# EAGLE board etchasketch (EAGLE 9.2.2)
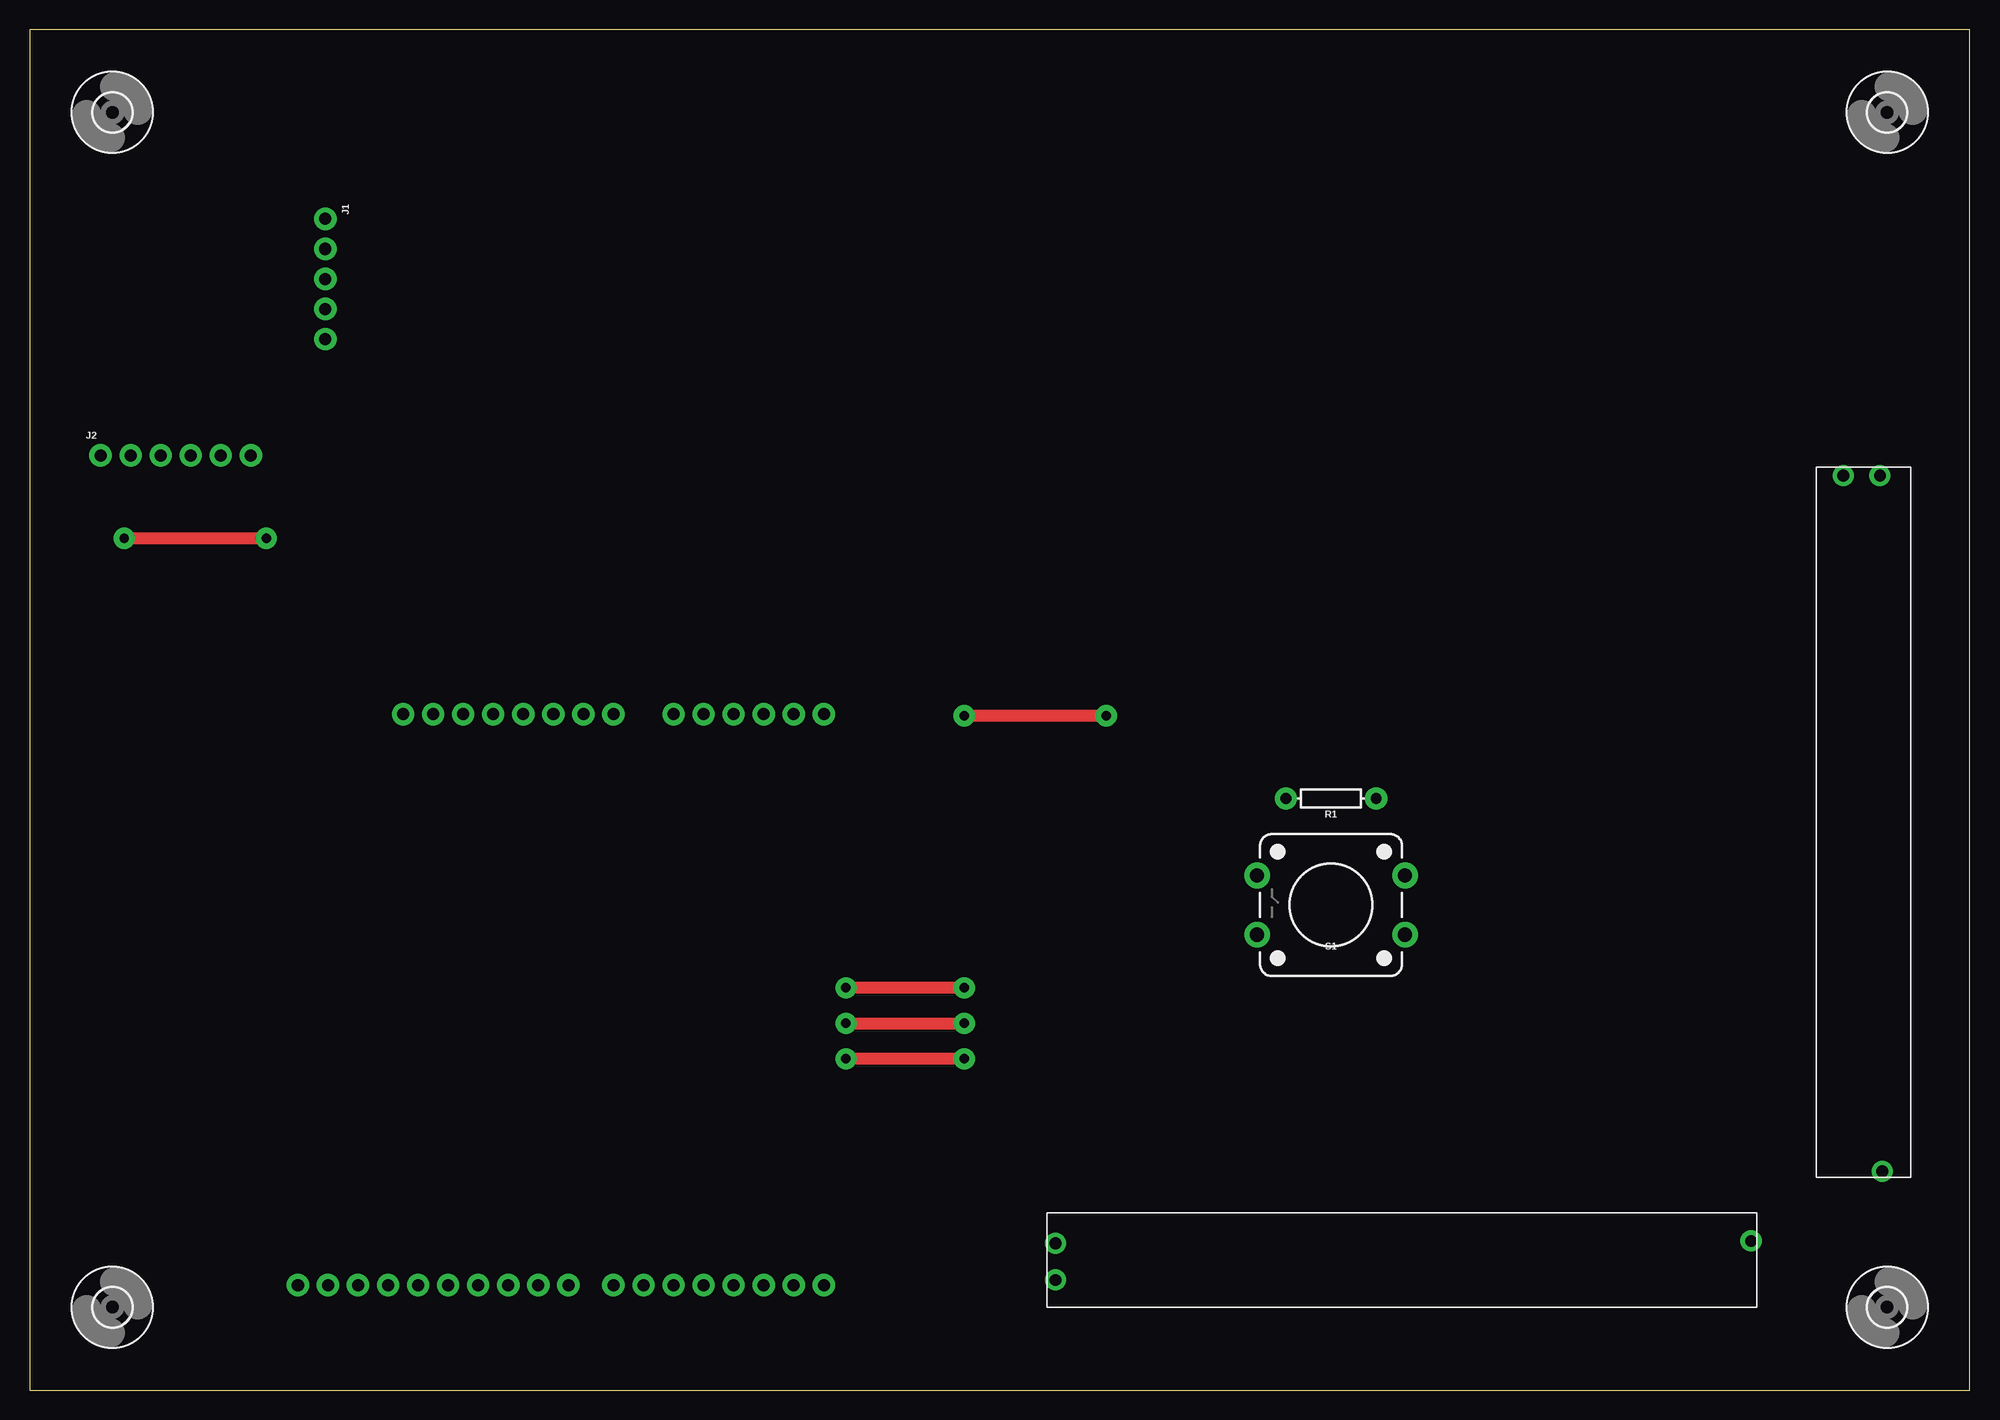
[diagram p0: board, top side]
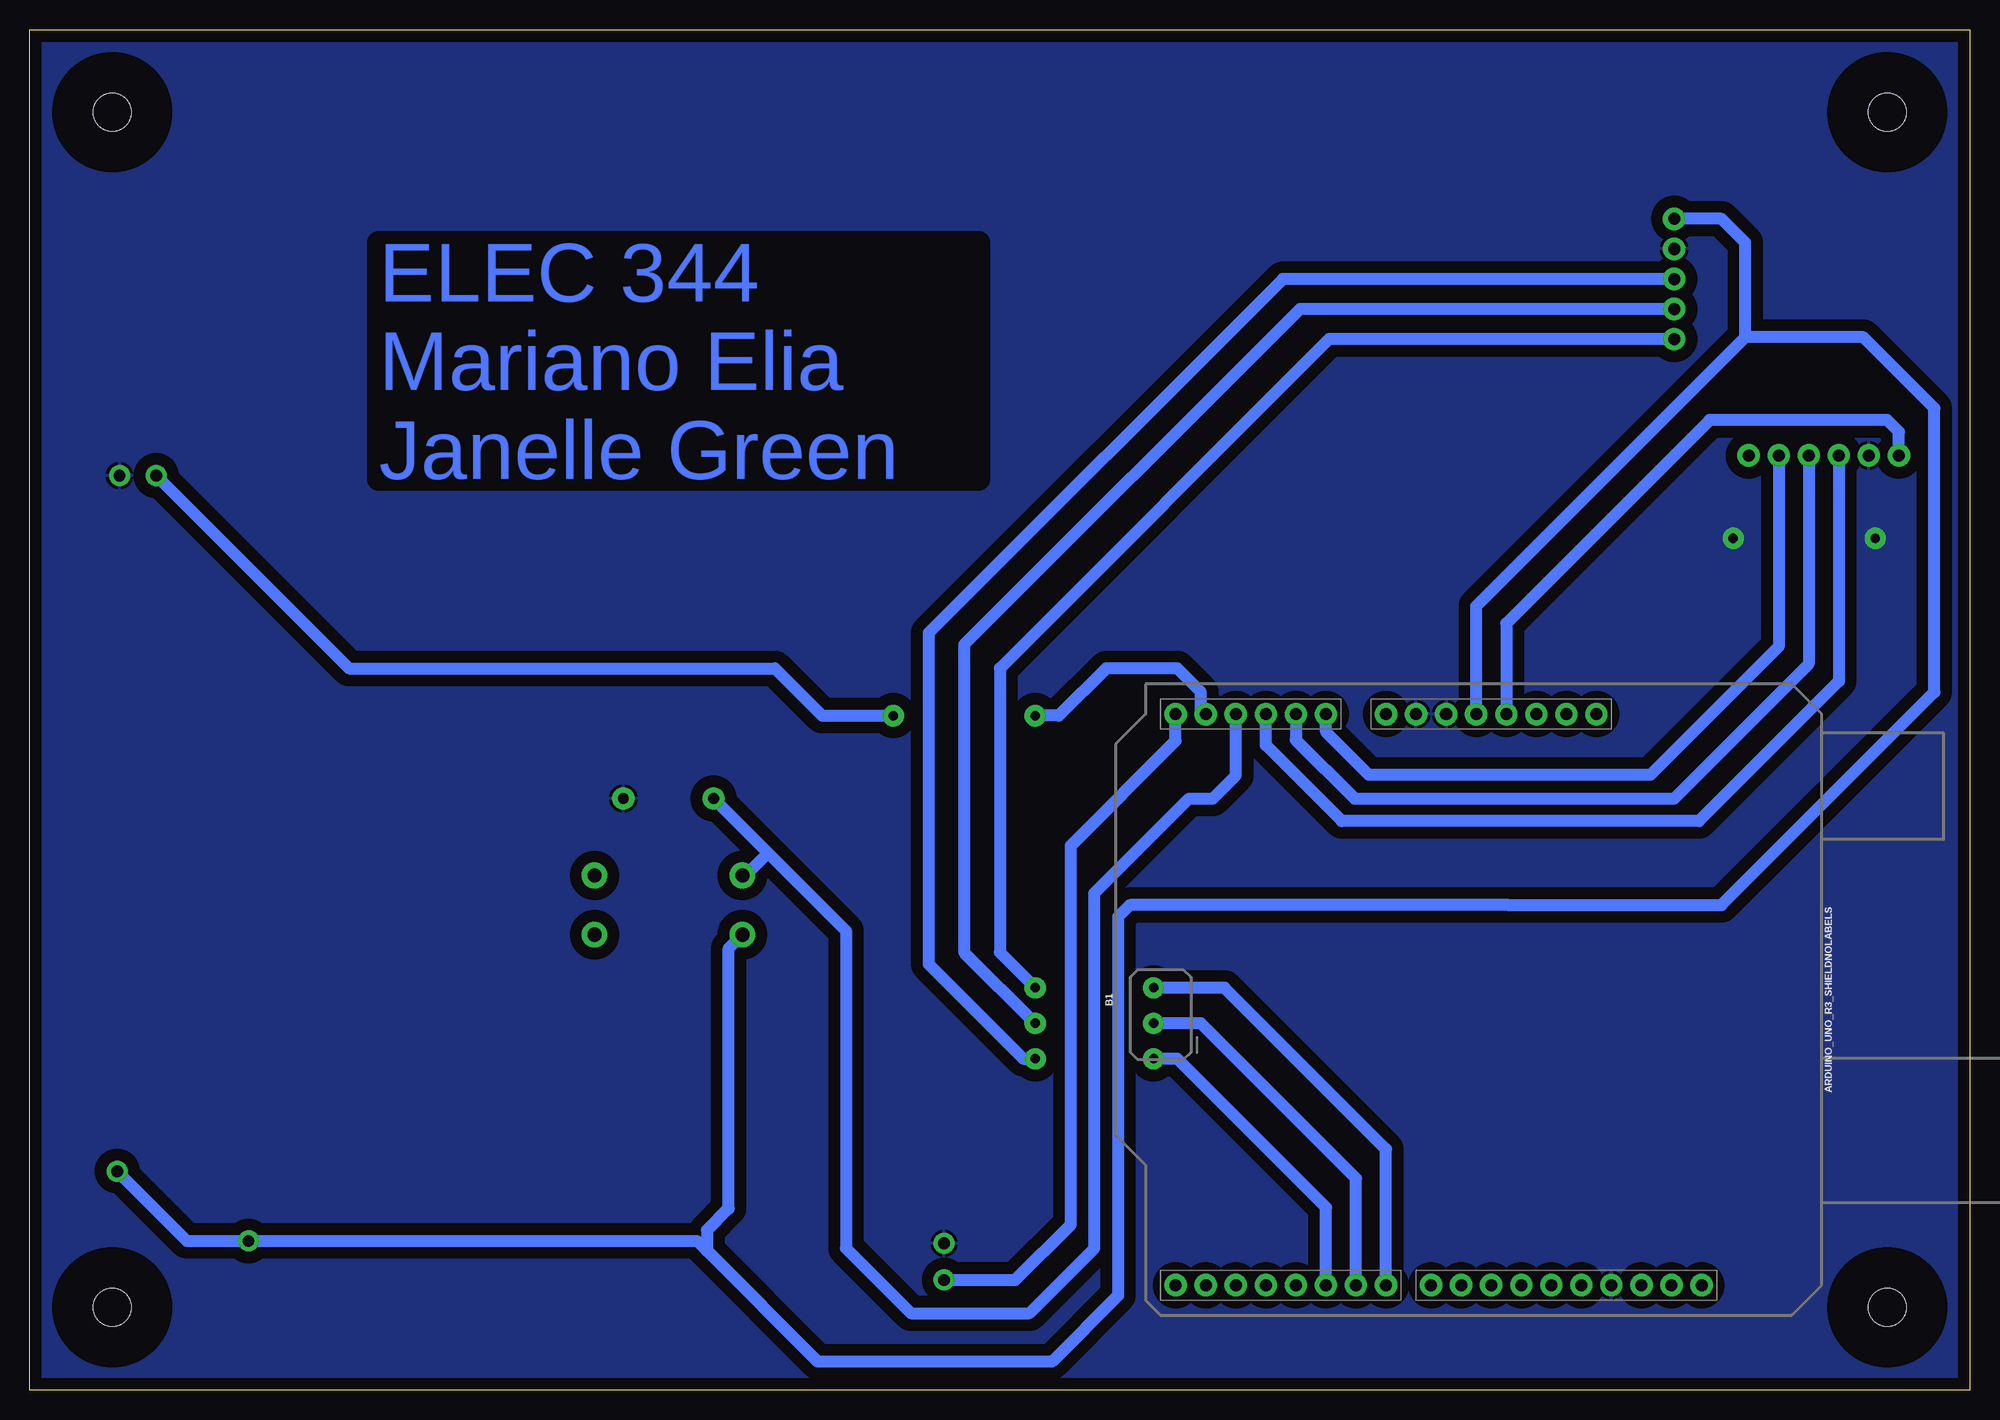
[diagram p1: board, bottom side, seen from below]

Size 164 x 115 mm. Coordinates in mm from the lower left corner, seen from the top.
Outline: 0,0 164,0 164,115 0,115 0,0
Copper layers (1*16): Top 0.035mm / dielectric 1.5mm / Bottom 0.035mm
Design rules "default *": minimum track width 12mil, minimum drill 0.35mm, track to track 10mil, track to pad 10mil, pad to pad 10mil, via to via 10mil, smd to smd 6mil, copper to edge 40mil, drill to drill 10mil, minimum pad ring 10mil, minimum via ring 8mil, stop-mask expansion 4mil, vias tented up to drill 0mil, thermal gap 10mil

## Footprints (pad centres in the part's own frame; a part is rotated, then mirrored left to right if it is on the bottom)
UNO_R3_SHIELD_NOLABELS = drill 1.016 pad 1.88: 3.3V 24.13,-3.81; 5V 24.13,-1.27; A0 24.13,11.43; A1 24.13,13.97; A2 24.13,16.51; A3 24.13,19.05; A4 24.13,21.59; A5 24.13,24.13; AREF -24.13,-15.24; D2 -24.13,19.05; D3 -24.13,16.51; D4 -24.13,13.97; D5 -24.13,11.43; D6 -24.13,8.89; D7 -24.13,6.35; D8 -24.13,2.54; D9 -24.13,0; D10 -24.13,-2.54; D11 -24.13,-5.08; D12 -24.13,-7.62; D13 -24.13,-10.16; GND@0 24.13,1.27; GND@1 24.13,3.81; GND@2 -24.13,-12.7; IOREF 24.13,-8.89; NC 24.13,-11.43; RES 24.13,-6.35; RX -24.13,24.13; SCL -24.13,-20.32; SDA -24.13,-17.78; TX -24.13,21.59; VIN 24.13,6.35
3,2 = hole 3.2: 0,0
1X05_NO_SILK = drill 1.016 pad 1.88: 1 0,0; 2 2.54,0; 3 5.08,0; 4 7.62,0; 5 10.16,0
1X06_NO_SILK = drill 1.016 pad 1.88: 1 0,0; 2 2.54,0; 3 5.08,0; 4 7.62,0; 5 10.16,0; 6 12.7,0
AXIAL-0.3 = drill 0.9 pad 1.88: P$1 -3.81,0; P$2 3.81,0
TACTILE_SWITCH_PTH_12MM = drill 1.2 pad 2.159: 1 6.25,-2.5; 2 -6.25,-2.5; 3 6.25,2.5; 4 -6.25,2.5
SLIDINGPOT = drill 1 pad 1.778: P$1 -29.3,1.4; P$2 -29.3,-1.7; P$3 29.5,1.6

## Placement (x,y rotation side)
B1  ARDUINO_UNO_R3_SHIELDNOLABELS  [UNO_R3_SHIELD_NOLABELS]  43,33 90 bottom
H1  MOUNT-HOLE3.2  [3,2]  7,7 0 top
H2  MOUNT-HOLE3.2  [3,2]  7,108 0 top
H3  MOUNT-HOLE3.2  [3,2]  157,108 0 top
H4  MOUNT-HOLE3.2  [3,2]  157,7 0 top
J1  [1X05_NO_SILK]  25,99 270 top
J2  [1X06_NO_SILK]  6,79 0 top
R1  10k  [AXIAL-0.3]  110,50 180 top
S1  MOMENTARY-SWITCH-SPST-PTH-12MM  [TACTILE_SWITCH_PTH_12MM]  110,41 180 top
U$1  6CMSLIDINGPOT  [SLIDINGPOT]  155,48 270 top
U$2  6CMSLIDINGPOT  [SLIDINGPOT]  116,11 0 top

## Library data of the parts
B1 = SparkFun-Boards
H1-H4 = holes
J1 J2 = SparkFun-Connectors
R1 = SparkFun-Resistors; PROD_ID: RES-09435
S1 = SparkFun-Switches; PROD_ID: SWCH-09185; SF_SKU: COM-09190
U$1 U$2 = TPS564208

## Nets
3.3V: B1.3.3V J2.1
5V: B1.5V J1.1 S1.3 U$1.P$3 U$2.P$3
CLK: B1.D7 J1.5
CS: B1.D6 J1.4
DIN: B1.D5 J1.3
GND: B1.GND@0 B1.GND@1 B1.GND@2 J1.2 J2.2 R1.P$1 U$1.P$1 U$2.P$1
N$1: B1.A4 U$1.P$2
N$2: B1.A3 R1.P$2 S1.1
N$6: B1.A5 U$2.P$2
ST: J2.6
XDIR: B1.A2 J2.3
YDIR: B1.A1 J2.4
ZDIR: B1.A0 J2.5

## Tracks (layer width: path | path; a pad name or v marks a point on that pad's centre or on a via)
3.3V
  Bottom 1: J2.1 6,81 7,82 22,82 39.19,64.81 B1.3.3V
5V
  Bottom 1: B1.5V 41.73,66.27 19,89 | J1.1 21,99 19,97 19,89 | U$1.P$3 150.7,12.6 U$2.P$3 107.6,12.6 106.75,11.75 | 19,89 9,89 3,83 3,59 21,41 38,41 39,41 71,41 72,40 72,8 77.6,2.4 97.4,2.4 106.75,11.75 | 106.75,11.75 106.75,13.51 104.9,15.35 104.9,37.35 S1.3
CLK  (via drill 0.8 pad 1.8)
  Top 1: v79,34 v69,34
  Bottom 1: B1.D7 49.35,20.35 63,34 v69,34 | J1.5 54.16,88.84 82,61 82,37 v79,34
CS  (via drill 0.8 pad 1.8)
  Top 1: v69,31 v79,31
  Bottom 1: B1.D6 51.89,17.89 65,31 v69,31 | J1.4 56.62,91.38 85,63 85,37 v79,31
DIN  (via drill 0.8 pad 1.8)
  Top 1: v79,28 v69,28
  Bottom 1: B1.D5 54.43,15.43 67,28 v69,28 | J1.3 58.08,93.92 88,64 88,36 80,28 v79,28
GND  (via drill 0.8 pad 1.8)
  Top 1: v8,72 v20,72
  pour Bottom (isolate 1): 0,0 164,0 164,115 0,115
N$1  (via drill 0.8 pad 1.8)
  Top 1: v79,57 v91,57
  Bottom 1: B1.A4 65,57.54 65,59 67,61 73,61 77,57 v79,57 | U$1.P$2 137,61 101,61 97,57 v91,57
N$2
  Bottom 1: R1.P$2 101.59,45.41 | 101.59,45.41 95,38.81 95,12 89.5,6.5 79.5,6.5 74,12 74,42 66,50 64,50 62.05,51.95 B1.A3 | S1.1 103.5,43.5 101.59,45.41
N$6
  Bottom 1: U$2.P$2 80.7,9.3 76,14 76,46 67.13,54.87 B1.A5
XDIR
  Bottom 1: J2.3 11.08,59.92 22.9,48.1 53.1,48.1 59.51,54.51 B1.A2
YDIR
  Bottom 1: J2.4 13.62,61.38 25,50 52,50 56.97,54.97 B1.A1
ZDIR
  Bottom 1: J2.5 16.16,62.84 27,52 50.8,52 54.43,55.63 B1.A0

## Text on the board
Bottom: ELEC 344 / Mariano Elia / Janelle Green